# Altium PCB IR-sensor.PcbDoc
Units mm, origin at the board's own origin, x right, y up, seen from the top; angles counter-clockwise.
Board outline 115 x 31 mm, 2 copper layers (Top Layer, Bottom Layer); 38 components, 22 nets, 115 pads, 107 vias.
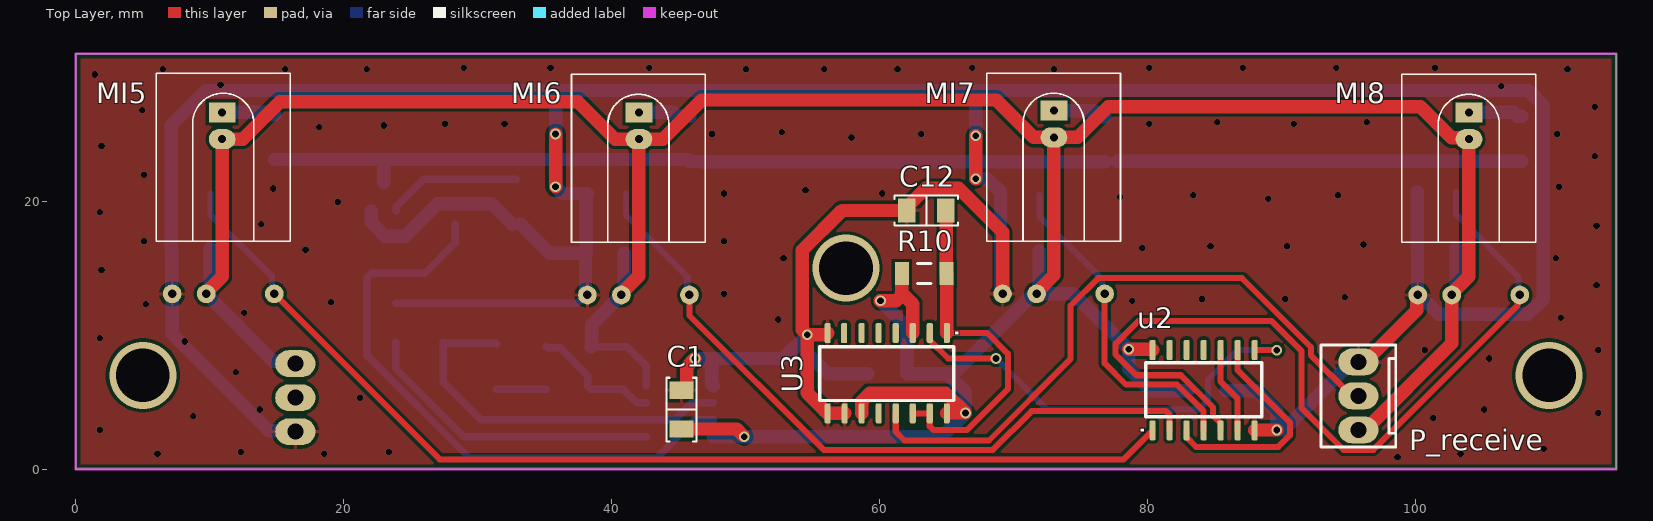
[diagram p0: Top Layer view]
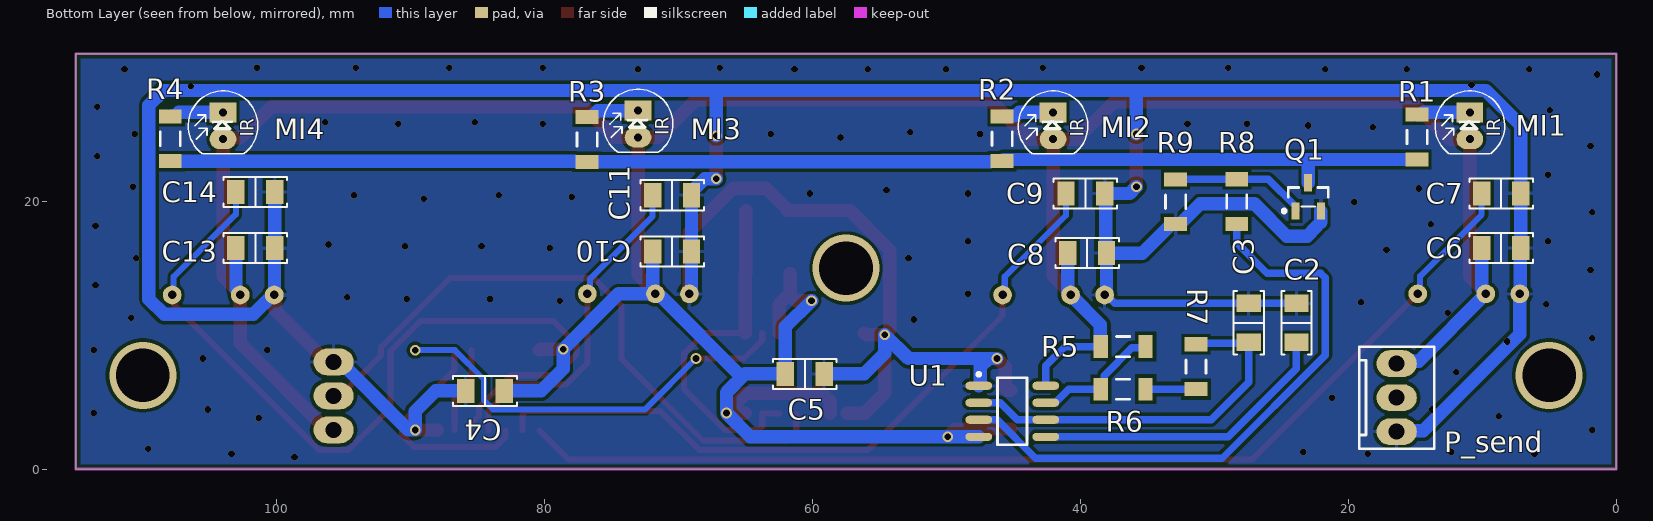
[diagram p1: Bottom Layer view, seen from below]
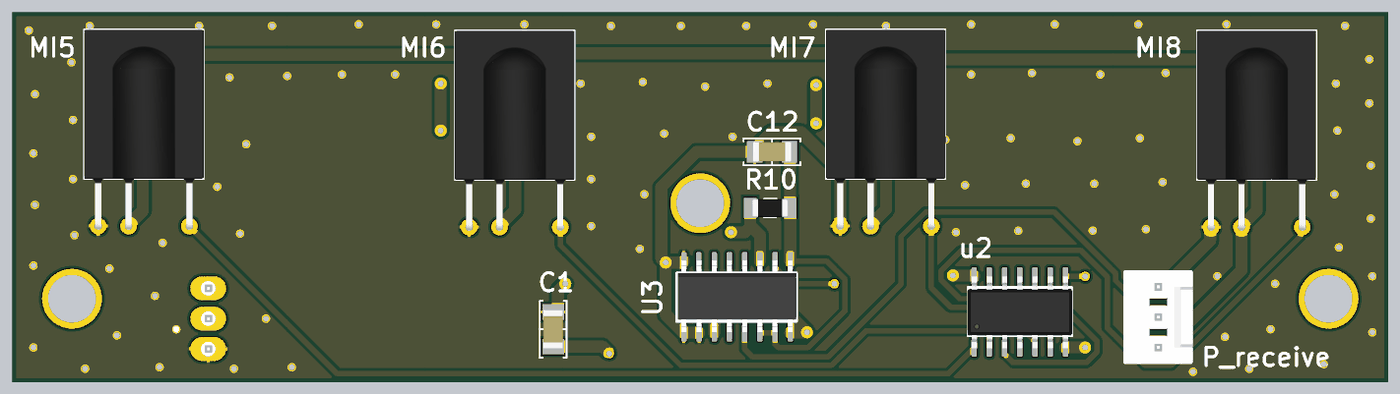
[diagram p2: 3D render of the assembled board from above, using the file's embedded part models]
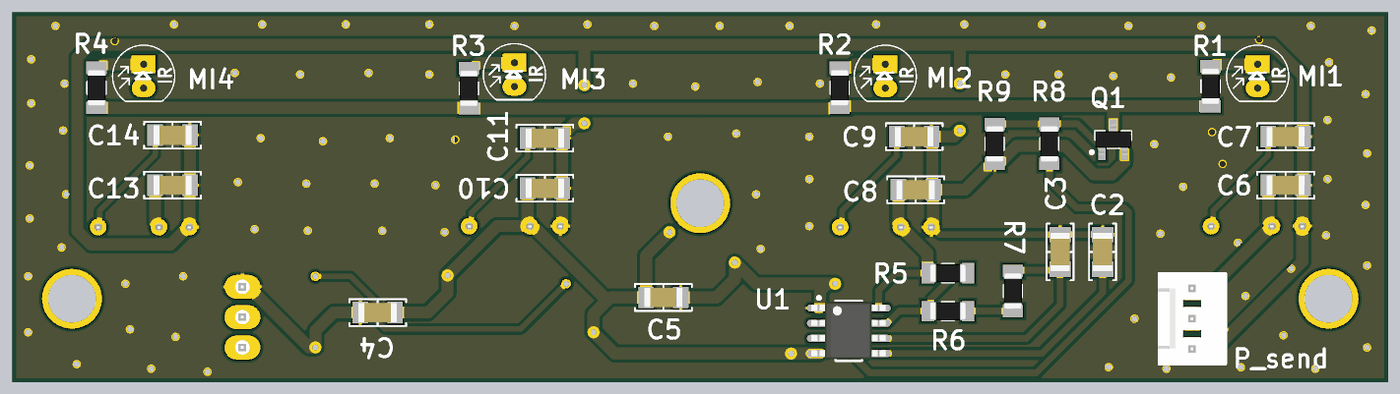
[diagram p3: 3D render of the assembled board from below, using the file's embedded part models]

## Layer stack, top to bottom
Top Solder: solder mask 0.0102, Solder Resist, Dk 3.5
Top Layer: signal copper 0.0356
Dielectric 1: dielectric 0.32, FR-4, Dk 4.8
Bottom Layer: signal copper 0.0356
Bottom Solder: solder mask 0.0102, Solder Resist, Dk 3.5

## Board outline
0,0 0,31 115,31 115,0

## Design rules (kind name [scope] priority, off if disabled: settings)
Clearance [All] p1: gap=0.254 ignorepadtopadclearanceinfootprint=FALSE
PolygonConnect [All] p1: connectstyle=Relief reliefconductorwidth=0.254 reliefentries=4 polygonreliefangle="90 Angle" airgapwidth=0.254
RoutingVias [All] p1: holewidth=0.711 width=1.27 viastyle="Through Hole" minholewidth=0.711 minwidth=1.27 maxholewidth=0.711 maxwidth=1.27
SolderMaskExpansion [All] p1: expansion=0.102 istentingtop=FALSE
Width [All] p1: maxlimit=1 minlimit=0.254 preferedwidth=0.45 minimp=50.000000 maximp=50.000000 favimp=50.000000
30 further rules are at their usual default settings.

## Classes and differential pairs
component class Send: C1 C2 C3 MI1 MI2 MI3 MI4 P_send Q1 R1 R2 R3 R4 R5 R6 R7 R8 R9 U1
component class Receive: C4 C5 C6 C7 C8 C9 C10 C11 C12 C13 C14 MI5 MI6 MI7 MI8 P_receive R10 u2 U3

## Components (designator, comment, footprint, x,y, rotation, side; value= is the part's Value field where it differs from the comment)
C1 "100n" "CAP 1206/3216" 45.212,4.445 r90 top
C2 "10n" "CAP 1206/3216" 23.876,10.922 r90 bottom
C3 "1n" "CAP 1206/3216" 27.432,10.922 r90 bottom
C4 "100n" "CAP 1206/3216" 84.455,5.842 r0 bottom
C5 "100n" "CAP 1206/3216" 60.579,7.112 r180 bottom
C6 "100n" "CAP 1206/3216" 8.583,16.51 r180 bottom
C7 "100n" "CAP 1206/3216" 8.583,20.574 r0 bottom
C8 "100n" "CAP 1206/3216" 39.497,16.129 r180 bottom
C9 "100n" "CAP 1206/3216" 39.624,20.574 r180 bottom
C10 "100n" "CAP 1206/3216" 70.485,16.256 r180 bottom
C11 "100n" "CAP 1206/3216" 70.485,20.447 r0 bottom
C12 "1uF" "CAP 1206/3216" 63.5,19.304 r180 top
C13 "100n" "CAP 1206/3216" 101.6,16.51 r180 bottom
C14 "100n" "CAP 1206/3216" 101.6,20.701 r0 bottom
MI1 "5'mm" "LED-5mm-IR Reciver" 10.922,24.638 r90 bottom
MI2 "5'mm" "LED-5mm-IR Reciver" 42.037,24.638 r90 bottom
MI3 "5'mm" "LED-5mm-IR Reciver" 73.025,24.765 r90 bottom
MI4 "5'mm" "LED-5mm-IR Reciver" 104.013,24.638 r90 bottom
MI5 "TSOP1138" TSOP1238 11,13.081 r0 top
MI6 "TSOP1138" TSOP1238 42,13 r0 top
MI7 "TSOP1138" TSOP1238 73,13.081 r0 top
MI8 "TSOP1138" TSOP1238 104,13 r0 top
P_receive "3'Pin" "MOLEX KK 0022272031" 95.758,5.461 r90 top
P_send "3'Pin" "MOLEX KK 0022272031" 16.383,5.334 r270 bottom
Q1 "NPN" SOT23_N 22.987,20.32 r90 bottom
R1 "150" "RES 1206 (3216X08L)" 14.859,23.495 r90 bottom
R2 "150" "RES 1206 (3216X08L)" 45.847,23.368 r90 bottom
R3 "150" "RES 1206 (3216X08L)" 76.835,23.316 r90 bottom
R4 "150" "RES 1206 (3216X08L)" 107.95,23.368 r90 bottom
R5 "1k" "RES 1206 (3216X08L)" 38.1,9.144 r180 bottom
R6 "18k" "RES 1206 (3216X08L)" 38.1,5.969 r180 bottom
R7 "470" "RES 1206 (3216X08L)" 31.369,6.35 r90 bottom
R8 "470" "RES 1206 (3216X08L)" 28.321,18.669 r90 bottom
R9 "47k" "RES 1206 (3216X08L)" 32.893,21.261 r270 bottom
R10 "220k" "RES 1206 (3216X08L)" 64.643,14.605 r180 top
U1 "NE555" SO8_narrow_n 45.085,4.318 r180 bottom
u2 "74hc32" SOIC-14 80.391,2.89 r90 top value=74HC32 (schematic designator U2)
U3 "74HC123" SOIC-16 65.024,10.16 r270 top

## Footprints (in the part's own frame and the unit in brackets; to place one, negate y for a bottom-side part, rotate by r counter-clockwise, add the part's x,y. Pads: shape width x height; smd on the part's side, far side on the other; paste and mask are expansions set on the pad)
"CAP 1206/3216" [mm] "Chip Capacitor, 2-Leads, Body 3.25x1.60mm, IPC Medium Density"
  rect 1.3x1.8 smd: 1(-1.45,0) 2(1.45,0)
  silkscreen extent -2.37,-1.12 2.37,1.12, body extent -1.6,-0.81 1.6,0.81, height 1.62
"LED-5mm-IR Reciver" [mm]
  oval 1.5x2 hole 0.6: 1(0,0)
  rect 1.5x2 hole 0.6: 2(2,0)
  silkscreen extent -1.1,-2.6 3.6,2.6
"MOLEX KK 0022272031" [mm]
  oval 2x3 hole 1.2: 1(-2.54,0) 2(0,0) 3(2.54,0)
  silkscreen extent -3.81,-2.79 3.81,2.79, body extent -3.81,-2.9 3.81,2.9, height 11.7
"RES 1206 (3216X08L)" [mm] "Chip Resistor, 2-Leads, Body 3.2x1.6mm, IPC High Density _ (0.125 W)"
  rect 1.05x1.7 smd: 1(-0.377,0) 2(2.973,0)
  silkscreen extent 0.8,-0.75 1.8,0.75, body extent -0.23,-0.76 2.82,0.76, height 0.6
SO8_narrow_n [mm] "8-Pin Small Outline Package (SO8), IPC Medium Density"
  oval 2x0.6 smd: 1(-2.5,1.905) 2(-2.5,0.635) 3(-2.5,-0.635) 4(-2.5,-1.905) 5(2.5,-1.905) 6(2.5,-0.635) 7(2.5,0.635) 8(2.5,1.905)
  silkscreen extent -2.63,-2.5 1.1,2.88, body extent -3.12,-2.39 3.07,2.44, height 1.7
SOIC-14 [mm]
  rrect50% 1.5x0.45 smd: 1(0,0) 2(0,-1.27) 3(0,-2.54) 4(0,-3.81) 5(0,-5.08) 6(0,-6.35) 7(0,-7.62) 8(6,-7.62) 9(6,-6.35) 10(6,-5.08) 11(6,-3.81) 12(6,-2.54) 13(6,-1.27) 14(6,0)
  silkscreen extent 1.02,-8.15 5.04,0.51, body extent -0.02,-8.23 5.97,0.57, height 1.7
SOIC-16 [mm]
  rrect50% 1.5x0.45 smd: 0(0,0) 1(0,-1.27) 2(0,-2.54) 3(0,-3.81) 4(0,-5.08) 5(0,-6.35) 6(0.011,-7.662) 7(0,-8.89) 8(6,-8.89) 9(6,-7.62) 10(6,-6.35) 11(6,-5.08) 12(6,-3.81) 13(6,-2.54) 14(6,-1.27) 15(6,0)
  silkscreen extent 1.02,-9.48 5.04,0.51, body extent -0.05,-9.4 5.95,0.5, height 1.4
SOT23_N [mm] "SOT23, 3-Leads, Body 2.9x1.3mm, Pitch 0.95mm, Lead Span 2.3mm, IPC Medium Density"
  rect 1.3x0.6 smd: 1(-1.05,0.95) 2(-1.05,-0.95) 3(1.05,0)
  silkscreen extent -1.17,-1.5 0.7,1.93, body extent -1.27,-1.5 1.27,1.5, height 1.1
TSOP1238 [mil] "IR Sensor (TV Sensor)"
  round 55 hole 25: 1(-150,0) 2(-50,0) 3(150,0)
  silkscreen extent -197,155 197,648, body extent -197,-9 197,648, height 228

## Part data
C1 C2 C3 C4 C5 C6 C7 C8 C9 C10 C11 C12 C13 C14: library part Cap_Multi_SMD_1206, "Bipolar ceramic capacitor SMD", Package=1206, Rating=Rating?, Inflow=inflow?, Type=MultiLayer, Validation=Valid
MI1 MI2 MI3 MI4: library part ModSen_IR_Reciever, "Infra Red Reciever Photo Diode", Package=Package?, Rating=Rating?, Inflow=8104, Type=Type?, Validation=NT
MI5 MI6 MI7 MI8: library part ModSen_IR_TSOP1138, "Reciver Remot Control (IR) 30-56KHz", Package=Package?, Rating=Rating?, Inflow=2118, Type=Type?, Validation=NT
P_receive P_send: library part Con_Signal_3, "Signal Connector 3'Pin", Package=Package?, Rating=Rating?, Inflow=inflow?, Type=Type?, Validation=Valid
Q1: library part Semi_BJT_2N2222_SMD, "NPN Switching Transistors", Package=Package?, Rating=Rating?, Inflow=5260, Type=Type?, Validation=Valid
R1 R2 R3 R4 R5 R6 R7 R8 R9 R10: library part Res_SMD_1206, "Resistor", Package=1206, Rating=0.25W, Inflow=inflow?, Type=10%, Validation=Valid
U1: library part IC_TIM_NE555_SMD, "Astable or monostable operation timer", Package=Package?, Rating=Rating?, Inflow=8109, Type=Type?, Validation=Valid
u2: library part 74HC32, "Quadruple 2-Input Positive OR Gate"
U3: "Dual retriggerable monostable multivibrator with reset"

## Via types
v1: diameter 0.5, hole 0.5, Top Layer to Bottom Layer, 91 vias
v2: diameter 0.8, hole 0.5, Top Layer to Bottom Layer, 13 vias
v3: diameter 5, hole 4, Top Layer to Bottom Layer, 3 vias

## Nets (pads, with @x,y where several pads share a name; then routed paths per layer and width w, separated by ;. In a path a pad name is that pad's centre, name@x,y a point inside that pad or via, vN(x,y) a via of type N, cw(c..) or ccw(c..) an arc to the next point about the centre after c; other vN are vias at no path point)
+5: C1.1 C4.1 C5.1 C6.1 C8.1 C10.1 C13.1 MI1.1 MI2.1 MI3.1 MI4.1 MI5.2 MI6.2 MI7.2 MI8.2 P_receive.1 P_send.1 R5.1 R10.2 U1.4 U1.8 u2.14 U3.2 U3.10 U3.15 | length 276
  Top Layer w1: MI5.2@9.837,13.081 MI5.2 9.73,13.188 10.922,14.38 MI1.1 12.446,24.638 15.24,27.432 37.465,27.432 40.259,24.638 MI2.1 ; MI6.2 40.73,13.107 42.037,14.414 MI2.1 ; C1.1 49.329,2.995 v2@49.784,2.54 ; U3.10 58.674,5.078 59.26,5.664 64.948,5.664 v2(66.421,4.191) 65.055,4.191 U3.15 ; v2(60.071,12.573) 61.242,12.573 61.67,13.001 61.67,13.144 ; R10.2 61.67,13.144 ; U3.2 62.484,12.33 61.67,13.144 ; MI7.2@71.73,12.974 MI7.2 71.73,13.188 73.025,14.483 MI3.1 ; v2(78.613,8.953) 80.328,8.953 u2.14 ; P_receive.1 96.258,2.921 102.73,9.393 MI8.2 102.73,13.107 104.013,14.39 MI4.1 103.917,24.734 102.711,24.734 100.394,27.051 77.089,27.051 74.803,24.765 MI3.1 ; MI2.1 43.815,24.638 46.736,27.559 68.707,27.559 71.501,24.765 MI3.1
  Bottom Layer w0.56: R5.1 41.148,9.144 42.585,7.707 U1.8
  Bottom Layer w1: C6.1 10.033,13.491 9.73,13.188 MI5.2 14.746,8.065 16.192,8.065 P_send.1 ; R5.1 38.502,9.169 38.502,10.772 MI6.2 40.73,13.107 40.947,13.324 C8.1 ; U1.4 v2(49.911,2.413) 64.643,2.413 v2(66.421,4.191) 66.421,5.715 65.024,7.112 C5.1 62.029,10.615 v2(60.071,12.573) ; 65.278,6.858 71.303,12.883 71.424,12.883 71.623,13.081 74.485,13.081 v2(78.613,8.953) 78.613,7.493 80.264,5.842 C4.1 ; MI7.2 71.73,13.188 71.935,13.393 C10.1 ; MI8.2 102.73,13.107 103.05,13.427 C13.1
GND: C1.2 C2.2 C3.2 C4.2 C5.2 C6.2 C7.1 C8.2 C9.2 C10.2 C11.1 C12.2 C13.2 C14.1 MI5.1 MI6.1 MI7.1 MI8.1 P_receive.3 P_send.3 Q1.2 R9.2 U1.1 u2.7 U3.7 U3.8 U3.9 | length 315.9
  Top Layer w1: MI5.1@7.159,13.112 MI5.1 ; v2(35.814,21.082) v2(35.814,25.019) ; MI6.1@38.083,13 MI6.1 ; C1.2 45.462,5.895 45.612,6.045 45.612,7.639 v2(46.228,8.255) ; U3.7 56.007,10.033 v2(54.61,10.033) ; U3.9 U3.8 56.109,4.16 55.859,4.41 55.859,4.435 54.61,5.684 v2(54.61,10.033) ; v2(67.183,21.685) v2(67.183,24.892) ; MI7.1@69.19,12.974 MI7.1 69.19,17.68 65.912,20.958 63.454,20.958 61.9,19.404 61.9,19.304 57.202,19.304 54.246,16.348 54.246,10.397 v2(54.61,10.033) ; u2.7 88.042,2.921 v2(89.662,2.921) ; P_receive.3@95.258,8.001 P_receive.3 96.258,8.001 100.114,11.857 100.114,12.924 MI8.1
  Bottom Layer w0.56: Q1.2 Q1.2@22.057,19.25 ; 22.057,18.414 22.385,18.086 ; C2.2 37.443,12.372 38.071,13 MI6.1 ; R9.2@32.568,18.288 R9.2 R9.2@33.218,18.288
  Bottom Layer w1: P_send.3 16.318,2.859 14.413,2.859 7.19,10.082 MI5.1 7.162,13.109 7.162,16.481 C6.2 C7.1 7.133,25.665 9.737,28.269 35.814,28.269 ; 22.057,18.414 Q1.2@22.057,19.25 ; 22.385,18.086 23.072,17.399 24.587,17.399 27,19.812 31.044,19.812 R9.2@32.568,18.288 ; R9.2@33.218,18.288 35.377,16.129 C8.2 ; v2(35.814,21.082) 36.322,20.574 C9.2 38.111,20.511 38.111,16.192 C8.2 ; v2(35.814,25.019) 35.814,28.269 ; MI6.1 38.19,13.107 38.047,13.25 C8.2 ; v2(46.228,8.255) 46.863,8.255 ; U1.1 47.481,6.327 47.481,7.637 46.863,8.255 ; C5.2 56.134,7.112 54.61,8.636 v2(54.61,10.033) 52.832,8.255 47.312,8.255 46.863,8.255 ; v2(67.183,21.685) 68.047,21.685 69.035,20.697 C11.1 C10.2 69.035,13.343 69.19,13.188 MI7.1 ; v2(67.183,24.892) 67.183,28.269 ; C4.2 88.138,5.842 89.662,4.318 v2(89.662,2.921) 90.178,2.921 95.258,8.001 P_receive.3 ; C14.1 C13.2 100.17,16.49 100.17,13.02 MI8.1 100.297,13 101.75,11.548 108.412,11.548 109.554,12.69 109.554,27.178 108.463,28.269 67.183,28.269 ; 35.814,28.269 67.183,28.269
  other v1: 98.679,0.889 6.096,1.143 18.542,1.143 103.378,1.143 12.319,1.27 23.368,1.27 109.601,1.524 1.778,2.921 101.346,3.81 8.763,3.937 113.665,4.191 13.716,4.445 105.156,4.445 21.209,5.334 11.938,7.239 105.537,8.255 100.711,8.89 113.665,8.89 8.128,9.525 1.778,9.779 52.451,11.176 110.871,11.303 12.573,11.684 5.207,12.319 19.05,12.446 78.867,12.573 84.074,12.7 90.297,12.7 94.742,12.827 48.387,13.081 113.538,13.716 1.905,14.859 52.832,15.748 110.49,15.748 17.145,16.383 79.629,16.51 84.709,16.637 90.424,16.637 96.139,16.764 5.08,17.018 48.387,17.018 113.538,18.161 13.843,18.288 1.778,19.177 19.558,19.939 89.027,20.193 77.978,20.32 83.439,20.447 94.234,20.447 48.387,20.574 60.198,20.574 54.483,20.828 14.732,20.955 110.744,21.082 5.08,21.971 113.411,23.368 1.905,24.13 57.912,24.765 47.498,25.019 63.119,25.019 110.617,25.019 52.705,25.146 18.161,25.527 22.987,25.654 27.559,25.781 32.004,25.781 80.137,25.781 90.932,25.781 85.217,25.908 96.393,25.908 4.953,26.797 113.411,27.051 106.426,28.575 10.795,28.702 1.397,29.464 6.477,29.845 15.621,29.845 21.717,29.845 50.038,29.845 55.88,29.845 61.341,29.845 73.025,29.845 111.379,29.845 28.956,29.972 35.433,29.972 42.799,29.972 66.929,29.972 80.137,29.972 87.122,29.972 94.107,29.972 101.473,29.972
NetC2_1: C2.1 U1.5 | length 22.8
  Bottom Layer w0.56: C2.1 23.876,7.493 28.956,2.413 U1.5
NetC3_1: C3.1 R7.2 U1.2 U1.6 | length 28.8
  Bottom Layer w0.56: R7.2 31.295,9.397 27.507,9.397 C3.1 27.432,6.477 30.226,3.683 U1.6 44.704,3.683 45.974,4.953 U1.2
NetC7_2: C7.2 MI5.3 u2.1 | length 81.1
  Top Layer w0.45: MI5.3 27.162,0.729 78.23,0.729 u2.1
  Bottom Layer w0.45: C7.2 10.033,18.999 14.629,14.403 14.629,13.262 MI5.3
NetC9_1: C9.1 MI6.3 u2.2 | length 53.6
  Top Layer w0.45: MI6.3 45.81,11.467 55.844,1.433 68.469,1.433 71.363,4.328 81.397,4.328 81.661,4.064 u2.2
  Bottom Layer w0.45: C9.1 41.074,18.946 45.646,14.373 45.646,13.164 MI6.3
NetC11_2: C11.2 MI7.3 u2.4 | length 24.9
  Top Layer w0.45: MI7.3 76.81,7.899 78.406,6.303 82.216,6.303 84.201,4.318 u2.4
  Bottom Layer w0.45: C11.2 71.935,18.872 76.629,14.178 76.629,13.262 MI7.3
NetC12_1: C12.1 R10.1 U3.0 U3.13 U3.14 | length 26.5
  Top Layer w0.45: U3.13 U3.14 63.754,3.195 64.018,2.931 66.546,2.931 69.586,5.971 69.586,8.619 68.043,10.162 U3.0@65.022,10.162
  Top Layer w1: C12.1 64.995,19.259 64.995,14.632 65.022,14.605 U3.0@65.022,10.162
NetC14_2: C14.2 MI8.3 u2.5 | length 63.8
  Top Layer w0.45: u2.5 85.471,3.415 84.905,3.981 84.905,4.61 82.508,7.007 79.175,7.007 77.634,8.547 77.634,9.358 79.325,11.049 89.281,11.049 91.507,8.823 91.507,4.58 94.645,1.442 96.871,1.442 107.629,12.2 107.629,12.819 MI8.3
  Bottom Layer w0.45: C14.2 103.05,19.021 107.698,14.373 107.698,13.112 MI8.3
NetMI1_2: MI1.2 R1.2 | length 4
  Bottom Layer w1: MI1.2 14.364,26.638 14.534,26.468 R1.2
NetMI2_2: MI2.2 R2.2 | length 4.4
  Bottom Layer w0.45: MI2.2 MI2.2@42.121,26.722 ; R2.2@45.522,26.341 R2.2
  Bottom Layer w1: MI2.2 44.577,26.638 44.849,26.366 45.822,26.366 R2.2
NetMI3_2: MI3.2 R3.2 | length 4
  Bottom Layer w1: MI3.2 76.034,26.765 76.51,26.289 R3.2
NetMI4_2: MI4.2 R4.2 | length 4.1
  Bottom Layer w1: MI4.2 107.328,26.638 107.625,26.341 R4.2
NetQ1_1: Q1.1 R8.2 R9.1 | length 10.1
  Bottom Layer w0.56: Q1.1 23.937,19.62 25.959,21.642 R8.2 28.323,21.64 32.891,21.64 R9.1
NetQ1_3: Q1.3 R1.1 R2.1 R3.1 R4.1 | length 94
  Bottom Layer w0.45: 22.983,23.118 22.987,23.114 ; R2.1@45.72,23.118 R2.1
  Bottom Layer w1: R1.1 18.923,23.118 ; 18.927,23.118 22.983,23.118 R2.1@45.72,23.118 ; Q1.3 22.987,23.114 ; R2.1 45.868,22.97 46.701,22.97 46.732,22.939 R3.1 ; 77.757,22.991 R4.1
NetR5_2: R5.2 R6.1 U1.7 | length 9.6
  Bottom Layer w0.56: R5.2 35.223,9.048 36.164,9.048 38.232,6.98 38.232,6.214 R6.1 40.869,5.969 41.885,4.953 U1.7
NetR6_2: R6.2 R7.1 | length 3.8
  Bottom Layer w0.56: R7.1 35.123,5.973 R6.2
NetR8_1: R8.1 U1.3 | length 45.1
  Bottom Layer w0.56: R8.1 28.321,16.891 26.035,14.605 22.045,14.605 21.717,14.277 21.717,8.501 29.426,0.792 43.337,0.792 46.22,3.675 47.577,3.675 U1.3
Netu2_3: u2.3 u2.9 | length 16.9
  Top Layer w0.45: u2.3 82.931,2.365 83.635,1.661 89.787,1.661 90.641,2.515 90.641,3.49 86.741,7.39 u2.9
Netu2_6: u2.6 u2.10 | length 6.5
  Top Layer w0.45: u2.10 85.471,6.525 86.741,5.255 u2.6
NetU2_8: u2.8 U3.1 | length 33
  Top Layer w0.45: U3.1 63.754,9.635 65.134,8.255 v2(68.707,8.255) ; u2.8 88.011,8.882 89.654,8.882 v2(89.662,8.875)
  Bottom Layer w0.45: v2(68.707,8.255) 72.499,4.463 83.853,4.463 84.527,5.137 84.527,6.692 86.71,8.875 v2(89.662,8.875)
OUT: P_receive.2 U3.12 | length 47.5
  Top Layer w0.45: U3.12 61.214,2.794 61.871,2.137 68.177,2.137 74.275,8.235 74.275,12.212 76.322,14.259 87.067,14.259 92.211,9.115 92.211,8.508 95.258,5.461 P_receive.2
pads on no net: P_send.2 u2.11 u2.12 u2.13 U3.3 U3.4 U3.5 U3.6 U3.11
copper on no net:
  other v3: 5,7 110,7 57.5,15

## Polygon pours and split planes (outlines as drawn)
GND on Top Layer "GND_L01_P000" (solid, pour order 0): 115,31 115,0 0,0 0,31
GND on Bottom Layer "GND_L02_P001" (solid, pour order 1): 115,31 115,0 0,0 0,31

## Keep-outs
Keep-Out Layer:
  the board outline again, w0.2

## Text inside footprints (layer, text, board x,y; h text height)
MI1: Bottom Overlay "IR" at 8.636,24.816 h1 r270
MI2: Bottom Overlay "IR" at 39.751,24.816 h1 r270
MI3: Bottom Overlay "IR" at 70.739,24.943 h1 r270
MI4: Bottom Overlay "IR" at 101.727,24.816 h1 r270